# Altium PCB Motor_Driver_IR2184_TPH1R403_Board_V1.0.PcbDoc
Units mm, origin at the board's own origin, x right, y up, seen from the top; angles counter-clockwise.
Board outline 86 x 46.5 mm, 2 copper layers (Top Layer, Bottom Layer); 71 components, 42 nets, 214 pads, 49 vias.
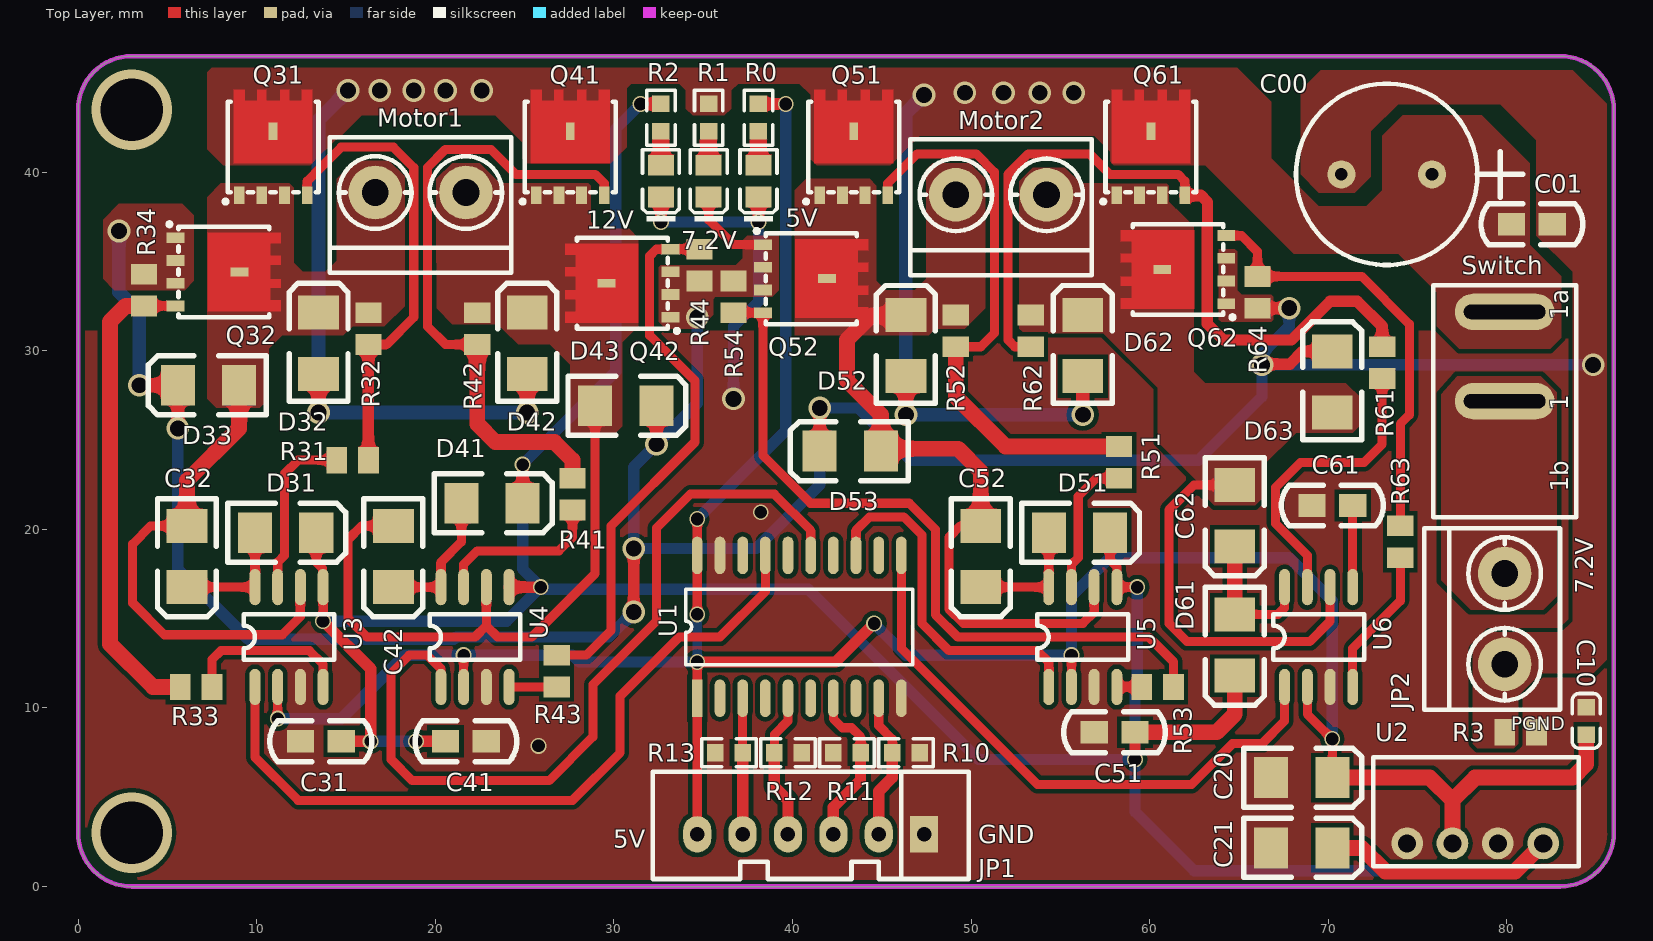
[diagram p0: Top Layer view]
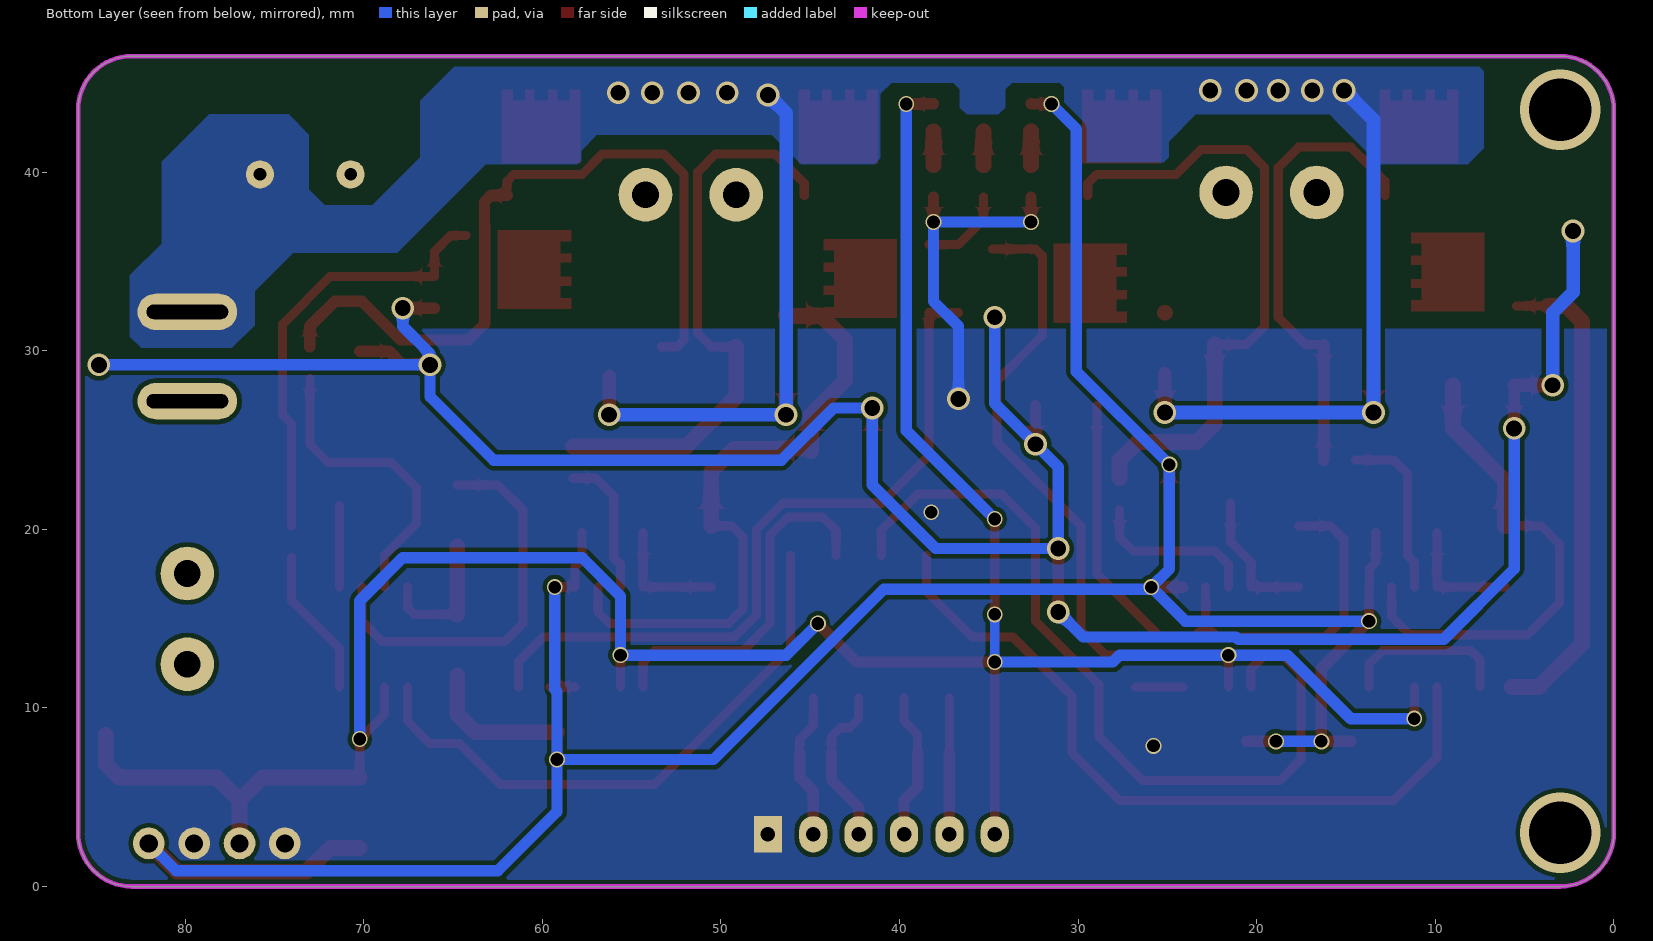
[diagram p1: Bottom Layer view, seen from below]
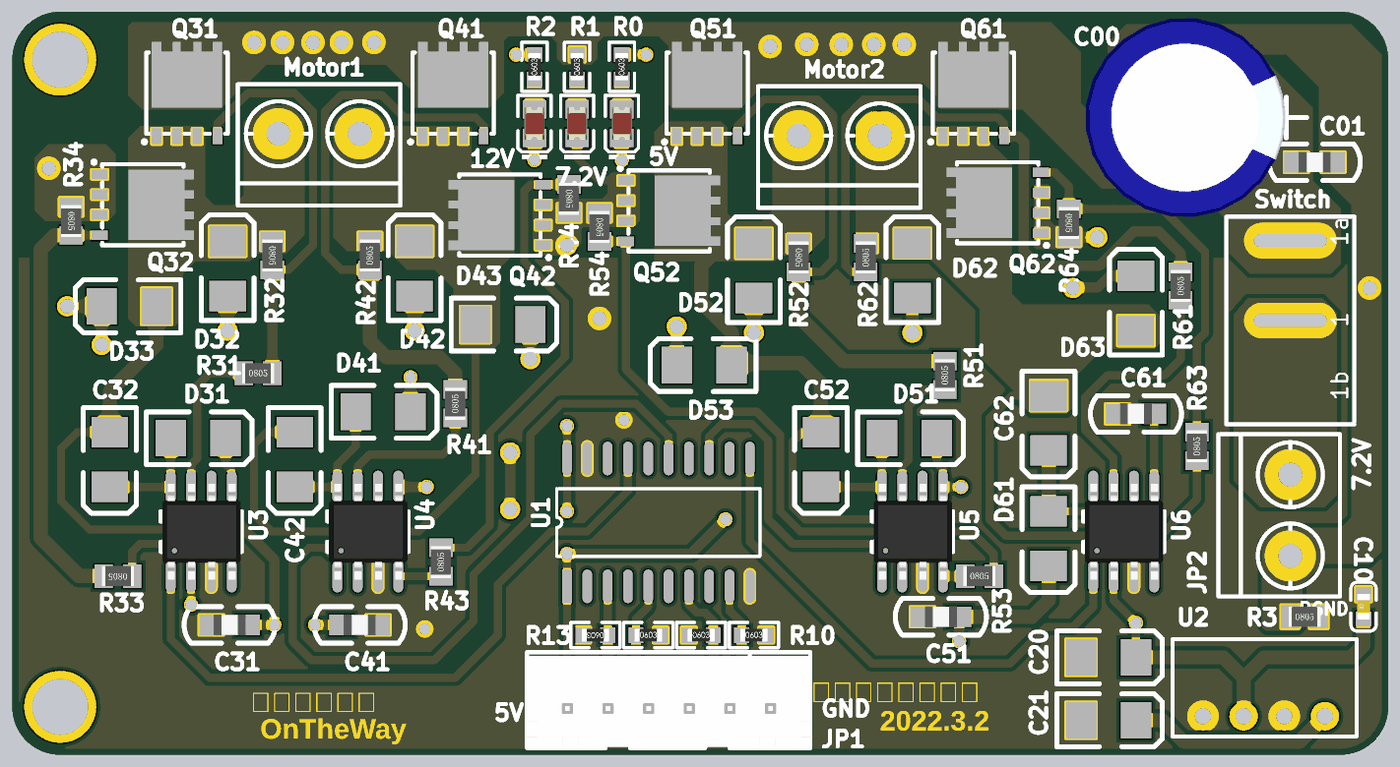
[diagram p2: 3D render of the assembled board from above, using the file's embedded part models]

## Layer stack, top to bottom
Top Solder: solder mask 0.0102, Solder Resist, Dk 3.5
Top Layer: signal copper 0.0356
Dielectric 1: dielectric 0.32, FR-4, Dk 4.8
Bottom Layer: signal copper 0.0356
Bottom Solder: solder mask 0.0102, Solder Resist, Dk 3.5

## Board outline
0,3 0,43.5 cw(c3,43.5) 3,46.5 83,46.5 cw(c83,43.5) 86,43.5 86,3 cw(c83,3) 83,0 3,0 cw(c3,3)

## Design rules (kind name [scope] priority, off if disabled: settings)
Clearance [All] p1: gap=0.254 ignorepadtopadclearanceinfootprint=FALSE except(0: Arc-Hole Track-Hole SMDPad-Hole THPad-Hole Via-Hole Fill-Hole Poly-Hole Region-Hole Text-Hole)
HoleSize [All] p1 off: absolutevalues=TRUE maxlimit=2.54 minlimit=0.025 maxpercent=80.000 minpercent=20.000
HoleToHoleClearance [All] p1 off: gap=0.254 allowstackedmicrovias=TRUE
MinimumSolderMaskSliver [All] p1 off: minsoldermaskwidth=0.254
PolygonConnect [All] p1: connectstyle=Direct reliefconductorwidth=0.254 reliefentries=4 polygonreliefangle="90 Angle" airgapwidth=0.254
RoutingVias [All] p1: holewidth=0.711 width=1.27 viastyle="Through Hole" minholewidth=0.711 minwidth=1.27 maxholewidth=0.711 maxwidth=1.27
SilkToSilkClearance [All] p1 off: silktosilkclearance=0.254
SilkToSolderMaskClearance [IsPad] p1 off: minsilkscreentomaskgap=0.254 clearancetoexposedcopper=TRUE
SolderMaskExpansion [All] p1: expansion=0.102
Width [All] p1: maxlimit=0.889 minlimit=0.254 preferedwidth=0.635
25 further rules are at their usual default settings.

## Components (designator, comment, footprint, x,y, rotation, side; value= is the part's Value field where it differs from the comment)
5V "" 0805_LED_S1 38.1,39.497 r90 top
7.2V "" 0805_LED_S1 35.306,39.497 r90 top
12V "" 0805_LED_S1 32.639,39.497 r90 top
C00 "470uF/25V" RB.2/.4 75.819,39.878 r0 top
C01 "100nF" 0805C 82.55,37.084 r180 top
C10 "100nF" 0603_C 84.455,9.271 r90 top
C20 "" 3528 70.231,6.096 r0 top value=4.7uF
C21 "" 3528 70.231,2.159 r0 top value=2.2uF
C31 "100nF" 0805C 14.732,8.128 r180 top
C32 "10uF/35V" 3528 6.096,16.764 r270 top
C41 "100nF" 0805C 20.574,8.128 r0 top
C42 "10uF/35V" 3528 17.653,16.764 r270 top
C51 "100nF" 0805C 59.182,8.636 r180 top
C52 "10uF/35V" 3528 50.546,16.764 r270 top
C61 "100nF" 0805C 71.374,21.336 r180 top
C62 "10uF/35V" 3528 64.77,19.05 r270 top
D31 "1N5819" 3528 13.335,19.812 r0 top
D32 "1N5819" 3528 13.462,32.131 r90 top
D33 "1N5819" 3528 5.588,28.067 r180 top
D41 "1N5819" 3528 24.892,21.463 r0 top
D42 "1N5819" 3528 25.146,32.131 r90 top
D43 "1N5819" 3528 32.385,26.924 r0 top
D51 "1N5819" 3528 57.785,19.812 r0 top
D52 "1N5819" 3528 46.355,32.004 r90 top
D53 "1N5819" 3528 41.529,24.384 r180 top
D61 "1N5819" 3528 64.77,11.811 r270 top
D62 "1N5819" 3528 56.261,32.004 r90 top
D63 "1N5819" 3528 70.231,29.972 r90 top
JP1 "HEADER 6" SIP6N 47.371,2.921 r180 top
JP2 "HEADER 2" KF301-2P 79.883,14.986 r180 top
Motor1 "HEADER 2" KF301-2P 19.177,38.862 r270 top
Motor2 "HEADER 2" KF301-2P 51.689,38.735 r270 top
Q31 "IR7843" TPH1R403 10.922,42.291 r90 top
Q32 "IR7843" TPH1R403 9.047,34.417 r0 top
Q41 "IR7843" TPH1R403 27.559,42.291 r90 top
Q42 "IR7843" TPH1R403 29.591,33.782 r180 top
Q51 "IR7843" TPH1R403 43.434,42.291 r90 top
Q52 "IR7843" TPH1R403 41.94,34.036 r0 top
Q61 "IR7843" TPH1R403 60.071,42.291 r90 top
Q62 "IR7843" TPH1R403 60.706,34.544 r180 top
R0 "4.7K" 0603_R 38.1,43.053 r90 top
R1 "4.7K" 0603_R 35.306,43.053 r90 top
R2 "4.7K" 0603_R 32.639,43.053 r90 top
R3 "0" 0805 80.772,8.636 r0 top
R10 "10K" 0603_R 46.355,7.493 r0 top
R11 "10K" 0603_R 43.053,7.493 r0 top
R12 "10K" 0603_R 39.751,7.493 r0 top
R13 "10K" 0603_R 36.449,7.493 r180 top
R31 "10" 0805 15.367,23.876 r0 top
R32 "10k" 0805 16.256,31.242 r270 top
R33 "10" 0805 6.604,11.176 r180 top
R34 "10k" 0805 3.683,33.401 r270 top
R41 "10" 0805 27.686,21.971 r90 top
R42 "10k" 0805 22.352,31.242 r90 top
R43 "10" 0805 26.797,12.064 r90 top
R44 "10k" 0805 34.798,34.798 r270 top
R51 "10" 0805 58.293,23.749 r90 top
R52 "10k" 0805 49.149,31.115 r270 top
R53 "10" 0805 60.452,11.176 r0 top
R54 "10k" 0805 36.703,33.02 r270 top
R61 "10" 0805 73.025,29.337 r90 top
R62 "10k" 0805 53.34,31.115 r90 top
R63 "10" 0805 74.041,19.304 r90 top
R64 "10k" 0805 66.04,33.274 r270 top
Switch "HEADER 2" SWITCH-MINI 79.883,27.178 r90 top
U1 "74HC245" SOP20 34.671,10.541 r90 top
U2 "B0512S-1W" SIP4_B_S-1W 84.023,1.143 r90 top
U3 "IR2184" SO-8 9.906,11.176 r90 top
U4 "IR2184" SO-8 20.32,11.176 r90 top
U5 "IR2184" SO-8 54.356,11.176 r90 top
U6 "IR2184" SO-8 67.564,11.176 r90 top

## Footprints (in the part's own frame and the unit in brackets; to place one, negate y for a bottom-side part, rotate by r counter-clockwise, add the part's x,y. Pads: shape width x height; smd on the part's side, far side on the other; paste and mask are expansions set on the pad)
0603_C [mm]
  rect 0.93x0.98 smd: 1(-0.77,0) 2(0.77,0)
  silkscreen extent -1.53,-0.79 1.54,0.79, body extent -0.8,-0.4 0.8,0.4, height 0.3
0603_R [mm]
  rect 0.93x0.98 smd: 1(-0.77,0) 2(0.77,0)
  silkscreen extent -1.53,-0.79 1.54,0.79, body extent -0.85,-0.4 0.85,0.4, height 0.56
0805 [mm]
  rect 1.16x1.47 smd: 1(-0.89,0) 2(0.89,0)
  body extent -1,-0.63 1,0.63, height 0.55
0805_LED_S1 [mm]
  rect 1.16x1.47 smd: A(0.89,0) K(-0.89,0)
  silkscreen extent -2.24,-1.04 1.77,1.03, body extent -1.01,-0.62 1.01,0.62, height 1.1
0805C [mil]
  rect 60x50 smd: 1(0,0) 2(90,0)
  silkscreen extent -67,-45 157,45, body extent 6,-26 84,26, height 29
3528 [mil]
  rect 75x90 smd: 1(0,0) 2(-135,0)
  silkscreen extent -195,-65 65,65
KF301-2P [mm]
  round 3 hole 1.5: 1(0,2.54) 2(0,-2.54)
  silkscreen extent -3.1,-5.08 4.5,5.08
RB.2/.4 [mil]
  round 62 hole 28: 1(0,0) 2(-200,0)
  silkscreen extent -300,-200 200,200, body extent -345,-246 147,246, height 986
SIP4_B_S-1W [mil]
  round 70 hole 40: 1(50,378) 2(50,278) 3(50,178) 4(50,78)
  silkscreen extent 0,0 240,453
SIP6N [mil]
  rect 62x80 hole 32: 1(0,0)
  oval 62x80 hole 32: 2(100,0) 3(200,0) 4(300,0) 5(400,0) 6(500,0)
  silkscreen extent -98,-138 598,98, body extent -99,-129 597,95, height 277
SO-8 [mil]
  oval 80x24 smd: 1(0,0) 2(0,-50) 3(0,-100) 4(0,-150) 5(220,-150) 6(220,-100) 7(220,-50) 8(220,0)
  silkscreen extent 60,-175 160,25, body extent -8,-172 228,20, height 67
SOP20 [mm]
  rect 2.1x0.6 smd: 1(0,0)
  oval 2.1x0.6 smd: 2(0,-1.27) 3(0,-2.54) 4(0,-3.81) 5(0,-5.08) 6(0,-6.35) 7(0,-7.62) 8(0,-8.89) 9(0,-10.16) 10(0,-11.43) 11(8,-11.43) 12(8,-10.16) 13(8,-8.89) 14(8,-7.62) 15(8,-6.35) 16(8,-5.08) 17(8,-3.81) 18(8,-2.54) 19(8,-1.27) 20(8,0)
  silkscreen extent 1.89,-12.06 6.11,0.64
SWITCH-MINI [mil]
  oval 80x220 hole 31.5 slot 180 at 90 deg: 1(0,0) 2(196.85,0)
  silkscreen extent -256,-157 256,157
TPH1R403 [mm]
  rect 1x0.5 smd: 1(0,0)
  rect 1x0.6 smd: 2(-3.586,-1.905) 3(-3.586,-0.635) 3(-3.586,0.635) 3(-3.586,1.905)
  Top Layer region: -1.786,2.2 2.314,2.2 2.314,1.6 1.714,1.6 1.714,0.9 2.314,0.9 2.314,0.4 1.714,0.4 1.714,-0.4 2.314,-0.4 2.314,-0.9 1.714,-0.9 1.714,-1.6 2.314,-1.6 2.314,-2.2 -1.786,-2.2
  silkscreen extent -4.04,-2.54 1.65,2.77

## Part data
5V 7.2V 12V: library part LED
C00 C32 C42 C52 C62: library part CAPACITOR, "Capacitor"
C01 C10 C31 C41 C51 C61: library part CAP, "Capacitor"
C20 C21: library part "Cap Pol3", "Polarized Capacitor (Surface Mount)", LatestRevisionDate=29-May-2009, LatestRevisionNote="IPC-7351 Footprint Added.", PackageDescription="Chip Capacitor", PackageReference=C0805, Published=8-Jun-2000, Publisher="Altium Limited"
D31 D32 D33 D41 D42 D43 D51 D52 D53 D61 D62 D63: library part Diode, "Default Diode", Code_JEDEC=DO-214-AB, LatestRevisionDate=17-Jul-2002, LatestRevisionNote="Re-released for DXP Platform.", PackageDescription="DO-214-AB/SMC; 2 C-Bend Leads; Body 7.9 x 5.9 mm, inc. leads (LxW)", PackageReference=SMC, PackageVersion=Sep-1996, Published=8-Jun-2000, Publisher="Altium Limited"
Q31 Q32 Q41 Q42 Q51 Q52 Q61 Q62: library part MOSFET-N, "N-Channel MOSFET", LatestRevisionDate=17-Jul-2002, LatestRevisionNote="Re-released for DXP Platform.", PackageDescription="TO, Flat Index; 3 In-Line, Axial Leads; Body Dia. 4.6mm; Lead Dia. 0.5 mm (max)", PackageReference=E3, PackageVersion=1995/1996, Published=8-Jun-2000, Publisher="Altium Limited"
R0 R1 R2 R3 R10 R11 R12 R13: library part RES2
R31 R32 R33 R34 R41 R42 R43 R44 R51 R52 R53 R54 R61 R62 R63 R64: library part RES2_1
U2: library part "4 HEADER", "4 Pin Header"

## Via types
v1: diameter 1.27, hole 0.889, Top Layer to Bottom Layer, 26 vias
v2: diameter 0.889, hole 0.711, Top Layer to Bottom Layer, 21 vias
v3: diameter 4.5, hole 3.5, Top Layer to Bottom Layer, 2 vias

## Nets (pads, with @x,y where several pads share a name; then routed paths per layer and width w, separated by ;. In a path a pad name is that pad's centre, name@x,y a point inside that pad or via, vN(x,y) a via of type N, cw(c..) or ccw(c..) an arc to the next point about the centre after c; other vN are vias at no path point)
5V: C10.1 C20.1 JP1.6 R0.2 U1.1 U1.20 U2.2 U3.2 U4.2 U5.2 U6.2 | length 150.4
  Top Layer w0.508: v2(11.176,9.398) U3.2 ; U4.2 v2(21.59,12.954) ; JP1.6 U1.1 v2(34.671,12.573) ; v2(34.671,15.24) U1.20 v2(34.671,20.574) ; R0.2@38.1,43.815 R0.2 ; U5.2 v2(55.626,12.954) ; U6.2 68.834,9.652 v2(70.231,8.255) C20.1
  Top Layer w0.635: v2(34.671,12.573) 42.418,12.573 v2(44.577,14.732) ; R0.2 39.616,43.823 v2(39.624,43.815)
  Top Layer w0.889: C20.1 75.692,6.096 76.962,4.826 ; U2.2 76.962,4.826 ; C10.1 84.455,6.858 83.693,6.096 78.232,6.096 76.962,4.826
  Bottom Layer w0.508: v2(34.671,12.573) v2(34.671,15.24)
  Bottom Layer w0.635: v2(11.176,9.398) 14.732,9.398 18.288,12.954 v2(21.59,12.954) 27.686,12.954 28.067,12.573 v2(34.671,12.573) ; v2(34.671,20.574) 39.624,25.527 v2(39.624,43.815) ; v2(44.577,14.732) 46.355,12.954 v2(55.626,12.954) 55.626,16.256 57.785,18.415 67.818,18.415 70.231,16.002 v2(70.231,8.255)
7.2V: C00.1 C01.2 D32.2 D42.2 D52.2 D62.2 Q31.1 Q41.1 Q51.1 Q61.1 R1.2 Switch.2 | length 67.3
  Top Layer w0.762: v1(13.462,26.543) D32.2 ; v1(25.146,26.543) D42.2 ; v1(46.355,26.416) D52.2 ; v1(56.261,26.416) D62.2
  Bottom Layer w0.762: v1(15.113,44.577) 13.462,42.926 v1(13.462,26.543) v1(25.146,26.543) ; v1(47.371,44.323) 46.355,43.307 v1(46.355,26.416) v1(56.261,26.416)
  other v1: 49.657,44.45 51.816,44.45 53.848,44.45 55.753,44.45 16.891,44.577 18.796,44.577 20.574,44.577 22.606,44.577
"7.2V In": JP2.2 Switch.1
12V: C21.1 C31.1 C41.1 C51.1 D31.1 D41.1 D51.1 D61.1 R2.2 U2.4 U3.5 U4.5 U5.5 | length 168.8
  Top Layer w0.508: D31.1 13.335,18.161 13.697,17.799 13.697,16.783 U3.5 v2(13.716,14.859) ; D51.1 57.785,18.288 58.166,17.907 U5.5 v2(59.309,16.764)
  Top Layer w0.635: v2(13.716,14.859) 16.383,12.192 v2(16.383,8.128) C31.1 ; v2(18.923,8.128) C41.1 ; U4.5 v2(25.908,16.764) ; D41.1 v2(24.892,23.622) ; v2(31.496,43.815) 31.5,43.819 32.635,43.819 R2.2 ; v2(59.182,7.112) C51.1
  Top Layer w0.889: C51.1 63.754,8.636 64.77,9.652 D61.1 ; C21.1 71.882,2.159 73.215,0.826 80.454,0.826 U2.4
  Bottom Layer w0.635: v2(13.716,14.859) 24.003,14.859 v2(25.908,16.764) ; v2(16.383,8.128) v2@18.796,8.128 ; v2(31.496,43.815) 30.099,42.418 30.099,28.829 v2(24.892,23.622) 24.892,17.78 v2(25.908,16.764) ; v2(59.309,16.764) 59.309,11.049 59.182,10.922 v2(59.182,7.112) ; U2.4 80.518,0.889 62.484,0.889 59.182,4.191 v2(59.182,7.112) ; v2(25.908,16.764) 25.977,16.764 26.104,16.637 40.894,16.637 50.419,7.112 v2(59.182,7.112)
GND: 5V.K 12V.K C10.2 C20.2 C21.2 C31.2 C41.2 C51.2 C61.2 JP1.1 R3.2 R10.2 R11.1 R12.2 R13.2 U1.10 U1.19 U2.1 U2.3 U3.3 U4.3 U5.3 U6.3 | length 18.7
  Top Layer w0.635: v2(32.639,37.211) 12V.K ; v2(38.1,37.211) 5V.K
  Bottom Layer w0.635: v2(32.639,37.211) v2(38.1,37.211) 38.1,32.766 36.703,31.369 v1(36.703,27.305)
  other v2: 25.781,7.874 38.227,20.955
"Motor In1": U1.17 U3.1 | length 42.2
  Top Layer w0.508: U3.1 9.906,7.239 12.319,4.826 27.686,4.826 30.353,7.493 30.353,10.668 33.655,13.97 35.941,13.97 38.481,16.51 U1.17
"Motor In2": U1.15 U4.1 | length 47
  Top Layer w0.508: U4.1 20.32,12.192 19.558,12.954 18.542,12.954 17.526,11.938 17.526,7.112 18.713,5.925 26.372,5.925 28.829,8.382 28.829,11.303 32.385,14.859 32.385,20.066 34.29,21.971 38.989,21.971 41.021,19.939 U1.15
"Motor In3": U1.13 U5.1 | length 20.2
  Top Layer w0.508: U1.13 43.561,19.939 44.323,20.701 46.228,20.701 47.244,19.685 47.244,14.732 48.768,13.208 53.721,13.208 54.356,12.573 U5.1
"Motor In4": U1.11 U6.1 | length 33.2
  Top Layer w0.508: U1.11 46.101,13.335 53.721,5.715 62.357,5.715 64.643,8.001 66.294,8.001 67.564,9.271 U6.1
"Motor Out1": C32.2 D32.1 D33.2 Motor1.2 Q31.3 Q32.1 R32.1 U3.6 | length 28.1
  Top Layer w0.508: C32.2 4.064,20.193 3.048,19.177 3.048,15.875 4.826,14.097 11.43,14.097 12.446,15.113 U3.6
  Top Layer w0.889: C32.2 6.096,22.733 9.017,25.654 D33.2
"Motor Out2": C42.2 D42.1 D43.2 Motor1.1 Q41.3 Q42.1 R42.2 U4.6 | length 35.1
  Top Layer w0.508: C42.2 15.875,20.193 15.113,19.431 15.113,15.03 16.173,13.97 22.225,13.97 22.86,14.605 ; U4.6 22.86,14.605 ; D43.2 28.956,17.526 25.4,13.97 23.495,13.97 22.86,14.605
  Top Layer w0.889: D42.1 D42.1
"Motor Out3": C52.2 D52.1 D53.2 Motor2.2 Q51.3 Q52.1 R52.1 U5.6 | length 36.3
  Top Layer w0.508: C52.2 49.403,20.193 48.768,19.558 48.768,15.538 49.574,14.732 56.261,14.732 56.896,15.367 U5.6
  Top Layer w0.889: D52.1 46.304,31.953 44.399,31.953 43.053,30.607 43.053,28.321 44.958,26.416 D53.2 45.085,24.511 49.276,24.511 50.546,23.241 C52.2
"Motor Out4": C62.2 D62.1 D63.2 Motor2.1 Q61.3 Q62.1 R62.2 U6.6 | length 22.4
  Top Layer w0.508: C62.2 62.484,22.479 61.087,21.082 61.087,14.732 62.103,13.716 68.961,13.716 70.104,14.859 U6.6
Net5V_A: 5V.A R0.1 | length 1.9
  Top Layer w0.889: 5V.A R0.1
Net7.2V_A: 7.2V.A R1.1 | length 1.9
  Top Layer w0.889: 7.2V.A R1.1
Net12V_A: 12V.A R2.1 | length 1.9
  Top Layer w0.889: 12V.A R2.1
NetC32_1: C32.1 D31.2 U3.8 | length 6.9
  Top Layer w0.508: C32.1 U3.8 D31.2
NetC42_1: C42.1 D41.2 U4.8 | length 7.8
  Top Layer w0.508: C42.1 U4.8 20.32,18.161 21.463,19.304 D41.2
NetC52_1: C52.1 D51.2 U5.8 | length 6.9
  Top Layer w0.508: C52.1 U5.8 D51.2
NetC61_1: C61.1 U6.5 | length 4.6
  Top Layer w0.508: U6.5 C61.1
NetC62_1: C62.1 D61.2 U6.8 | length 7.9
  Top Layer w0.508: D61.2 67.183,15.24 67.545,15.602 67.545,16.745 U6.8
  Top Layer w0.889: D61.2 C62.1
NetQ31_2: Q31.2 R31.2 R32.2 | length 26.1
  Top Layer w0.508: Q31.2 12.827,39.491 13.63,40.294 13.63,40.3 14.732,41.402 17.653,41.402 18.796,40.259 18.796,31.877 17.271,30.352 R32.2
  Top Layer w0.635: R32.2 R31.2 R31.2
NetQ32_2: Q32.2 R33.2 R34.2 | length 27
  Top Layer w0.508: R34.2 Q32.2
  Top Layer w0.635: R34.2 R34.2
  Top Layer w0.889: R34.2 R34.2 2.667,32.512 1.778,31.623 1.778,13.589 4.191,11.176 R33.2
NetQ41_2: Q41.2 R41.2 R42.1 | length 35.5
  Top Layer w0.508: R42.1 20.575,30.352 19.558,31.369 19.558,40.259 20.574,41.275 23.114,41.275 24.511,39.878 28.956,39.878 29.464,39.37 Q41.2
  Top Layer w0.889: R42.1 22.352,25.908 23.368,24.892 26.67,24.892 27.686,23.876 R41.2
NetQ42_2: Q42.2 R43.2 R44.1 | length 30.5
  Top Layer w0.508: R43.2 28.448,12.954 29.845,14.351 29.845,20.193 34.544,24.892 34.544,28.321 32.004,30.861 32.004,35.306 32.385,35.687 Q42.2 R44.1
NetQ51_2: Q51.2 R51.2 R52.2 | length 32.3
  Top Layer w0.508: Q51.2 45.339,39.37 46.99,41.021 50.292,41.021 51.308,40.005 51.308,30.988 50.545,30.225 R52.2
  Top Layer w0.889: R52.2 49.149,27.432 51.942,24.639 R51.2
NetQ52_2: Q52.2 R53.2 R54.2 | length 41.6
  Top Layer w0.508: R54.2 Q52.2 Q52.2 38.354,24.13 41.021,21.463 46.544,21.463 48.006,20.001 48.006,15.222 49.258,13.97 59.944,13.97 61.342,12.572 R53.2
NetQ61_2: Q61.2 R61.2 R62.1 | length 43.5
  Top Layer w0.508: R62.1 R62.1 52.451,30.226 52.07,30.607 52.07,39.878 53.213,41.021 56.636,41.021 57.779,39.878 61.595,39.878 61.976,39.497 Q61.2
  Top Layer w0.635: Q61.2 62.874,38.705 63.246,38.333 63.246,37.036 63.221,37.011 63.221,31.521 64.135,30.607 67.945,30.607 70.104,32.766 71.628,32.766 73.025,31.369 R61.2
NetQ62_2: Q62.2 R63.2 R64.1 | length 24.6
  Top Layer w0.508: Q62.2 65.151,36.449 66.04,35.56 R64.1 R64.1 71.882,34.163 74.549,31.496 74.549,26.416 74.041,25.908 R63.2
NetR31_1: R31.1 U3.7 | length 9.7
  Top Layer w0.508: U3.7 11.176,18.161 11.557,18.542 11.557,23.114 12.319,23.876 R31.1
NetR33_1: R33.1 U3.4 | length 9.5
  Top Layer w0.508: R33.1 R33.1 7.493,12.7 8.001,13.208 12.954,13.208 13.716,12.446 U3.4
NetR41_1: R41.1 U4.7 | length 9.5
  Top Layer w0.508: U4.7 21.59,18.034 22.352,18.796 26.924,18.796 27.686,19.558 R41.1
NetR43_1: R43.1 U4.4 | length 2.7
  Top Layer w0.508: U4.4 24.132,11.174 R43.1
NetR51_1: R51.1 U5.7 | length 7.9
  Top Layer w0.508: U5.7 55.626,18.034 56.007,18.415 56.007,21.844 57.023,22.86 R51.1 R51.1
NetR53_1: R53.1 U5.4 | length 1.4
  Top Layer w0.508: U5.4 R53.1
NetR61_1: R61.1 U6.7 | length 17
  Top Layer w0.508: U6.7 68.834,18.542 67.056,20.32 67.056,22.352 68.453,23.749 72.009,23.749 73.025,24.765 R61.1
NetR63_1: R63.1 U6.4 | length 8.3
  Top Layer w0.508: U6.4 71.374,13.335 74.041,16.002 R63.1
PGND: 7.2V.K C00.2 C01.1 D33.1 D43.1 D53.1 D63.1 JP2.1 Q32.3 Q42.3 Q52.3 Q62.3 R3.1 R34.1 R44.2 R54.1 R64.2 | length 150.6
  Top Layer w0.508: 7.2V.K 35.306,37.338 36.703,35.941 Q52.3@38.354,35.941
  Top Layer w0.635: v1(5.588,25.654) D33.1 ; v1(31.115,15.367) v1(31.115,18.923) ; v1(32.385,24.765) D43.1 ; D53.1 v1(41.529,26.797) ; R64.2 v1(67.818,32.385) v1(67.818,32.385) ; v1(66.294,29.21) 66.337,29.253 67.861,29.253 68.58,29.972 D63.1
  Top Layer w0.762: v1(3.429,28.067) D33.1
  Bottom Layer w0.635: v1(5.588,25.654) 5.588,17.78 9.525,13.843 21.042,13.843 21.169,13.97 29.718,13.97 v1(31.115,15.367) ; v1(34.671,31.877) 34.671,27.051 v1(32.385,24.765) 31.115,23.495 v1(31.115,18.923) 37.973,18.923 41.529,22.479 v1(41.529,26.797) 43.688,26.797 46.609,23.876 62.738,23.876 66.294,27.432 v1(66.294,29.21) ; v1(67.818,32.385) 67.818,31.369 66.294,29.845 v1(66.294,29.21) ; v1(84.836,29.21) v1(66.294,29.21)
  Bottom Layer w0.762: v1(2.286,36.703) 2.286,33.274 3.429,32.131 v1(3.429,28.067)
PWM1: JP1.5 R13.1 U1.3 | length 7.6
  Top Layer w0.508: U1.3 37.211,7.501 R13.1
  Top Layer w0.635: JP1.5 37.219,2.929 R13.1
PWM2: JP1.4 R12.1 U1.5 | length 8.3
  Top Layer w0.508: R12.1 38.989,7.501 38.989,8.509 39.751,9.271 U1.5
  Top Layer w0.635: R12.1 38.981,5.596 39.751,4.826 JP1.4
PWM3: JP1.3 R11.2 U1.7 | length 9.2
  Top Layer w0.508: U1.7 42.291,9.398 42.799,8.89 43.307,8.89 43.815,8.382 R11.2@43.815,7.485
  Top Layer w0.635: JP1.3 42.291,4.445 43.815,5.969 R11.2@43.815,7.485
PWM4: JP1.2 R10.1 U1.9 | length 8.3
  Top Layer w0.508: U1.9 44.831,9.017 45.593,8.255 45.593,7.501 R10.1
  Top Layer w0.635: JP1.2 44.831,5.334 45.585,6.088 R10.1
pads on no net: U1.2 U1.4 U1.6 U1.8 U1.12 U1.14 U1.16 U1.18
copper on no net:
  other v3: 3,3 3,43.5

## Polygon pours and split planes (outlines as drawn)
GND on Top Layer "Top Layer-No Net" (solid, remove dead copper, pour order 40): -3.429,31.242 -3.302,31.115 94.615,31.115 94.615,-4.445 92.456,-6.604 -4.699,-6.604
PGND on Top Layer "Top Layer-No Net" (solid, remove dead copper, pour order 34): 63.881,35.687 63.881,31.75 64.008,31.623 66.802,31.623 66.929,31.75 66.929,33.02 66.802,33.147 65.151,33.147 64.897,33.401 64.897,35.56 64.77,35.687
PGND on Top Layer "Top Layer-No Net" (solid, remove dead copper, pour order 32): 2.032,33.401 5.969,33.401 6.477,33.909 6.477,37.592 5.842,38.227 2.286,38.227 1.397,37.338 1.397,34.036
PGND on Top Layer "Top Layer-No Net" (solid, remove dead copper, pour order 26): 32.639,34.798 32.512,34.671 32.512,31.623 32.766,31.369 32.893,31.242 34.798,31.242 35.56,32.004 35.56,32.893 35.687,33.02 38.862,33.02 39.243,33.401 39.243,36.449 37.465,36.449 37.211,36.195 37.211,35.179 36.83,34.798
PGND on Top Layer "Top Layer-No Net" (solid, remove dead copper, pour order 24): 68.453,39.878 69.469,38.862 71.501,38.862 72.39,39.751 72.39,42.291 73.914,43.815 79.629,43.815 81.661,41.783 81.661,41.529 81.661,36.449 83.693,34.417 83.693,14.859 83.058,14.224 78.994,14.224 78.105,13.335 78.105,8.001 78.359,7.747 80.391,7.747 80.645,8.001 80.645,10.668 81.915,11.938 84.836,11.938 85.598,12.7 85.598,43.815 83.693,45.72 69.596,45.72 68.453,44.577
"7.2V In" on Top Layer "Top Layer-No Net" (solid, remove dead copper, pour order 20): 77.216,28.575 81.915,28.575 82.804,27.686 82.804,16.256 82.042,15.494 77.978,15.494 76.327,17.145 76.327,27.559
no net on Top Layer "Top Layer-No Net" (solid, remove dead copper, pour order 18): 77.089,28.829
7.2V on Top Layer "Top Layer-No Net" (solid, remove dead copper, pour order 16): 76.073,31.369 77.343,30.099 82.423,30.099 83.058,30.734 83.058,34.163 81.28,35.941 81.28,40.513 78.613,43.18 74.168,43.18 73.025,42.037 73.025,38.989 72.136,38.1 69.469,38.1 66.802,40.767 66.802,43.942 64.897,45.847 7.493,45.847 7.239,45.593 7.239,41.275 8.128,40.386 13.081,40.386 15.494,42.799 15.875,43.18 23.368,43.18 24.892,41.656 24.892,40.767 25.154,40.505 29.837,40.505 30.734,41.402 30.734,44.704 30.988,44.958 33.655,44.958 34.036,44.577 34.036,43.561 34.417,43.18 36.195,43.18 36.576,43.561 36.576,44.577 36.957,44.958 40.386,44.958 41.021,44.323 41.021,40.718 41.353,40.386 45.466,40.386 47.117,42.037 56.896,42.037 57.785,41.148 57.785,40.591 57.99,40.386 63.119,40.386 68.072,35.433 73.914,35.433 76.073,33.274
"Motor Out4" on Top Layer "Top Layer-No Net" (solid, remove dead copper, pour order 14): 62.992,21.971 63.627,21.336 65.913,21.336 66.294,21.717 66.294,23.495 68.199,25.4 71.374,25.4 71.882,25.908 71.882,27.305 70.993,28.194 63.119,28.194 62.484,28.829 62.484,36.957 62.357,37.084 61.087,38.354 61.087,39.243 60.96,39.37 56.134,39.37 55.245,40.259 53.467,40.259 52.705,39.497 52.705,31.242 52.959,30.988 57.404,30.988 60.452,27.94 60.452,24.892 62.992,22.352
"Motor Out3" on Top Layer "Top Layer-No Net" (solid, remove dead copper, pour order 12): 40.132,30.861 47.625,30.861 48.006,31.242 49.657,31.242 49.784,31.369 50.8,32.385 50.8,39.624 49.911,40.513 47.879,40.513 47.498,40.132 47.498,34.036 47.371,33.909 46.863,33.401 45.212,33.401 44.704,33.909 44.704,39.243 44.323,39.624 40.767,39.624 40.132,38.989
"Motor Out2" on Top Layer "Top Layer-No Net" (solid, remove dead copper, pour order 10): 23.876,31.115 23.495,31.496 23.495,33.02 26.035,33.02 26.035,31.115
"Motor Out2" on Top Layer "Top Layer-No Net" (solid, remove dead copper, pour order 8): 20.066,34.925 20.066,32.385 20.955,31.496 26.67,31.496 26.67,34.925
"Motor Out2" on Top Layer "Top Layer-No Net" (solid, remove dead copper, pour order 6): 27.559,25.273 29.972,25.273 30.48,25.781 30.48,30.48 31.377,31.377 31.377,36.314 30.861,36.83 29.083,36.83 28.702,37.211 28.702,39.243 28.575,39.37 23.622,39.37 22.479,40.513 20.955,40.513 20.066,39.624 20.066,34.925 20.955,34.036 22.987,34.036 23.876,33.147 23.876,31.115 24.638,30.353 26.416,30.353 27.559,29.21
"Motor Out1" on Top Layer "Top Layer-No Net" (solid, remove dead copper, pour order 4): 8.001,39.37 7.239,38.608 7.239,27.305 7.747,26.797 10.16,26.797 10.668,27.305 10.668,30.099 11.43,30.861 14.859,30.861 15.367,31.369 17.145,31.369 18.288,32.512 18.288,39.751 17.399,40.64 15.494,40.64 14.478,39.624 14.478,35.052 13.843,34.417 12.573,34.417 12.065,34.925 12.065,39.116 11.811,39.37
no net on Top Layer "Top Layer-No Net" (solid, remove dead copper, pour order 2): 7.239,39.116
no net on Top Layer "Top Layer-No Net" (solid, remove dead copper, pour order 0): 7.62,39.624
GND on Bottom Layer "Top Layer-No Net" (solid, remove dead copper, pour order 42): -6.223,31.242 94.869,31.242 95.631,30.48 95.25,30.099 95.25,-4.953 -0.762,-4.953 -4.064,-8.255
7.2V on Bottom Layer "Top Layer-No Net" (solid, remove dead copper, pour order 28): 76.121,31.43 77.391,30.16 82.471,30.16 83.106,30.795 83.106,34.224 81.328,36.002 81.328,40.574 78.661,43.241 74.216,43.241 73.073,42.098 73.073,39.05 72.184,38.161 69.517,38.161 66.85,40.828 66.85,44.003 64.945,45.908 7.541,45.908 7.287,45.654 7.287,41.336 8.176,40.447 13.129,40.447 15.542,42.86 15.923,43.241 23.416,43.241 24.94,41.717 24.94,40.828 25.202,40.566 29.885,40.566 30.782,41.463 30.782,44.765 31.036,45.019 33.703,45.019 34.084,44.638 34.084,43.622 34.465,43.241 36.243,43.241 36.624,43.622 36.624,44.638 37.005,45.019 40.434,45.019 41.069,44.384 41.069,40.779 41.401,40.447 45.514,40.447 47.165,42.098 56.944,42.098 57.833,41.209 57.833,40.652 58.038,40.447 63.167,40.447 68.12,35.494 73.962,35.494 76.121,33.335

## Keep-outs
Keep-Out Layer:
  the board outline again, w0.254

## Silkscreen, mask and mechanical layers (free items; w line width, h text height)
Top Overlay:
  text "7.2V" at 84.836,16.383 h1 r90
  text "PGND" at 80.264,8.763 h0.76
  text "GND" at 50.419,2.413 h1
  text "5V" at 29.972,2.159 h1
Top Solder:
  text "十七届四轮摄像头" at 49.911,3.302 h2
  text "合肥工业大学" at 14.859,2.667 h2
  text "2022.3.2" at 54.229,1.524 h2
  text "OnTheWay" at 15.494,1.016 h2

## Text inside footprints (layer, text, board x,y; h text height)
Switch: Top Overlay "1b" at 83.439,22.098 h1 r90; Top Overlay "1" at 83.439,26.67 h1 r90; Top Overlay "1a" at 83.439,31.75 h1 r90